# Altium PCB Orient.PcbDoc (part 2 of 4)
Units mil, origin at the board's own origin, x right, y up, seen from the top; angles counter-clockwise.
Board outline 3600 x 2400 mil, 4 copper layers (Top Layer, Layer 1, Layer 2, Bottom Layer), stack 23.756 mil thick; 365 components, 303 nets, 1656 pads, 303 vias.
Unrouted connection lines stored in the file: 1026.
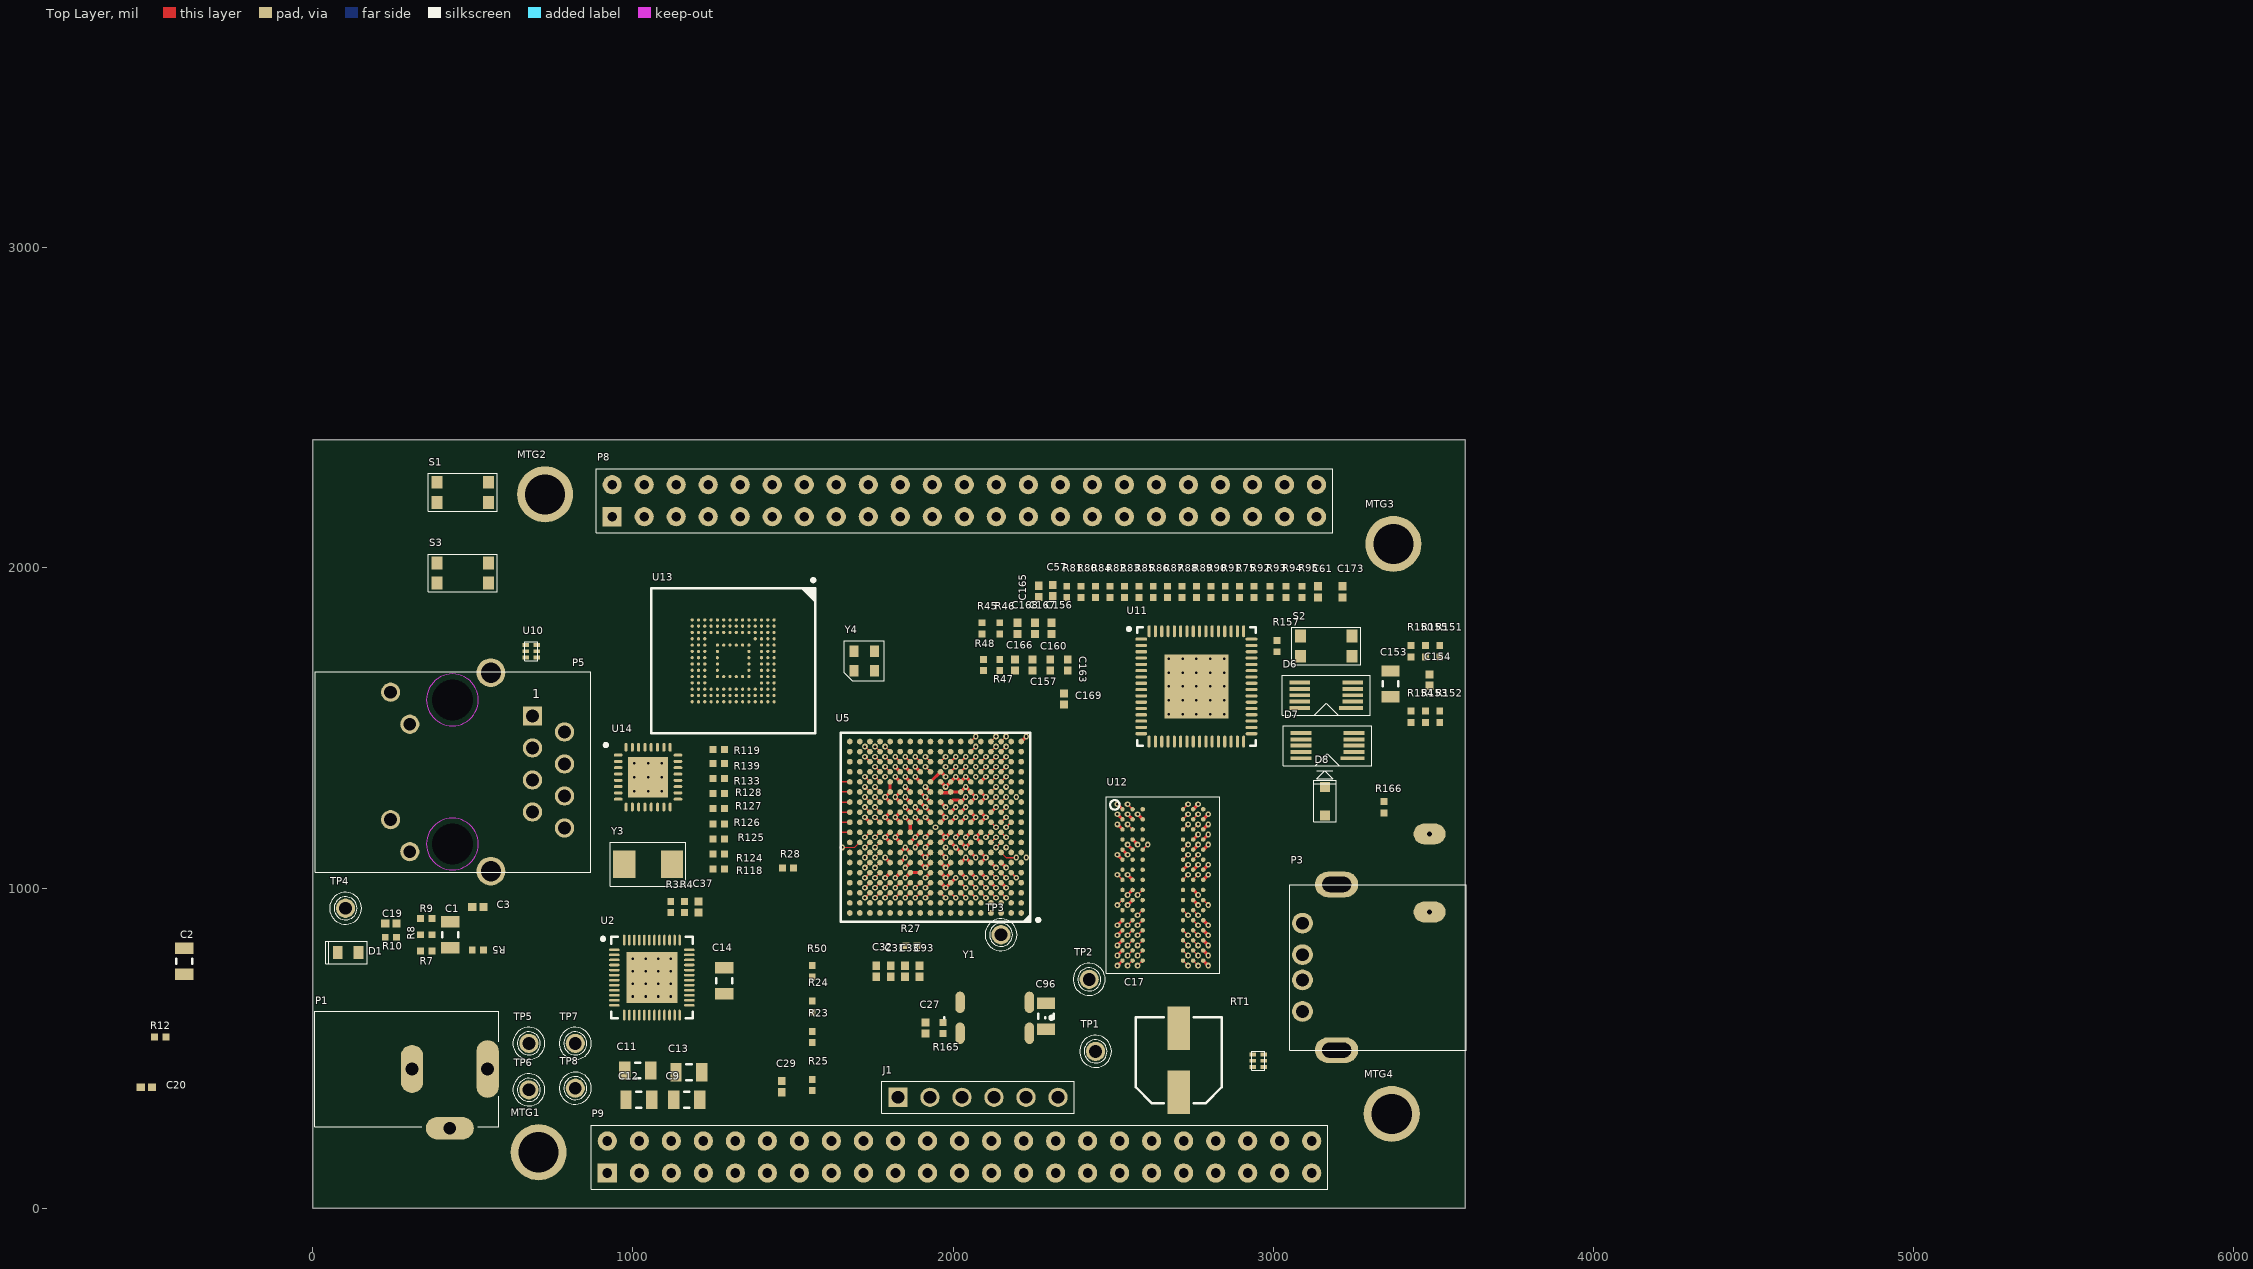
[diagram p0: Top Layer view]

## Part data (continued)
C3 C20 C27 C28 C29 C30 C31 C33 C35 C36 C37 C38 C41 C42 C43 C44 C45 C46 C47 C48 C49 C50 C51 C52 C53 C54 C56 C57 C58 C59 C60 C61 C63 C64 C65 C66 C67 C68 C69 C70 C71 C72 C73 C74 C75 C76 C78 C79 C80 C81 C82 C83 C84 C85 C86 C87 C88 C92 C93 C94 C97 C98 C99 C100 C101 C102 C103 C105 C106 C131 C132 C135 C152 C154 C155 C158 C159: library part CAP_100nF, "MLCC 100nF 0402 SMD", Capacitance=100nF, Case/Package=0402, Case Code (Metric)=1005, Dielectric=X7R, Manufacturer=KEMET, Max Operating Temperature=125°C, Min Operating Temperature=-55°C, Package Quantity=10000, Supplier Part Number 1=399-3521-1-ND, Tolerance=10%, Voltage Rating=16V, Case Code (Imperial)=0402, ComponentLink2Description=Datasheet, ComponentLink2URL=https://datasheet.ciiva.com/18192/getdatasheetpartid-385384-18192412.pdf?src-supplier=Verical, Contact Plating=Tin,Matte, Depth=0.5mm, Dissipation Factor=3.5%, Height=0.5mm, Length=1mm, Manufacturer Part Number=C0402C104K4RACTU, Mount="Surface Mount", Packaging="Tape and Reel", Pricing 1="1=0.10000, 10=0.04200, 100=0.01860, 500=0.01328, 1000=0.01044, 2500=0.00949, 5000=0.00873 (USD)", Radiation Hardening=No, RoHS=Yes, Stock 1=6512243, Supplier 1=Digi-Key, Termination=SMD/SMT, Voltage Rating (DC)=16V, Width=0.5mm